# Altium PCB GimbalPCB.PcbDoc
Units mil, origin at the board's own origin, x right, y up, seen from the top; angles counter-clockwise.
Board outline 2362.2 x 2559.06 mil, 2 copper layers (Top Layer, Bottom Layer); 15 components, 16 nets, 60 pads, 12 vias.
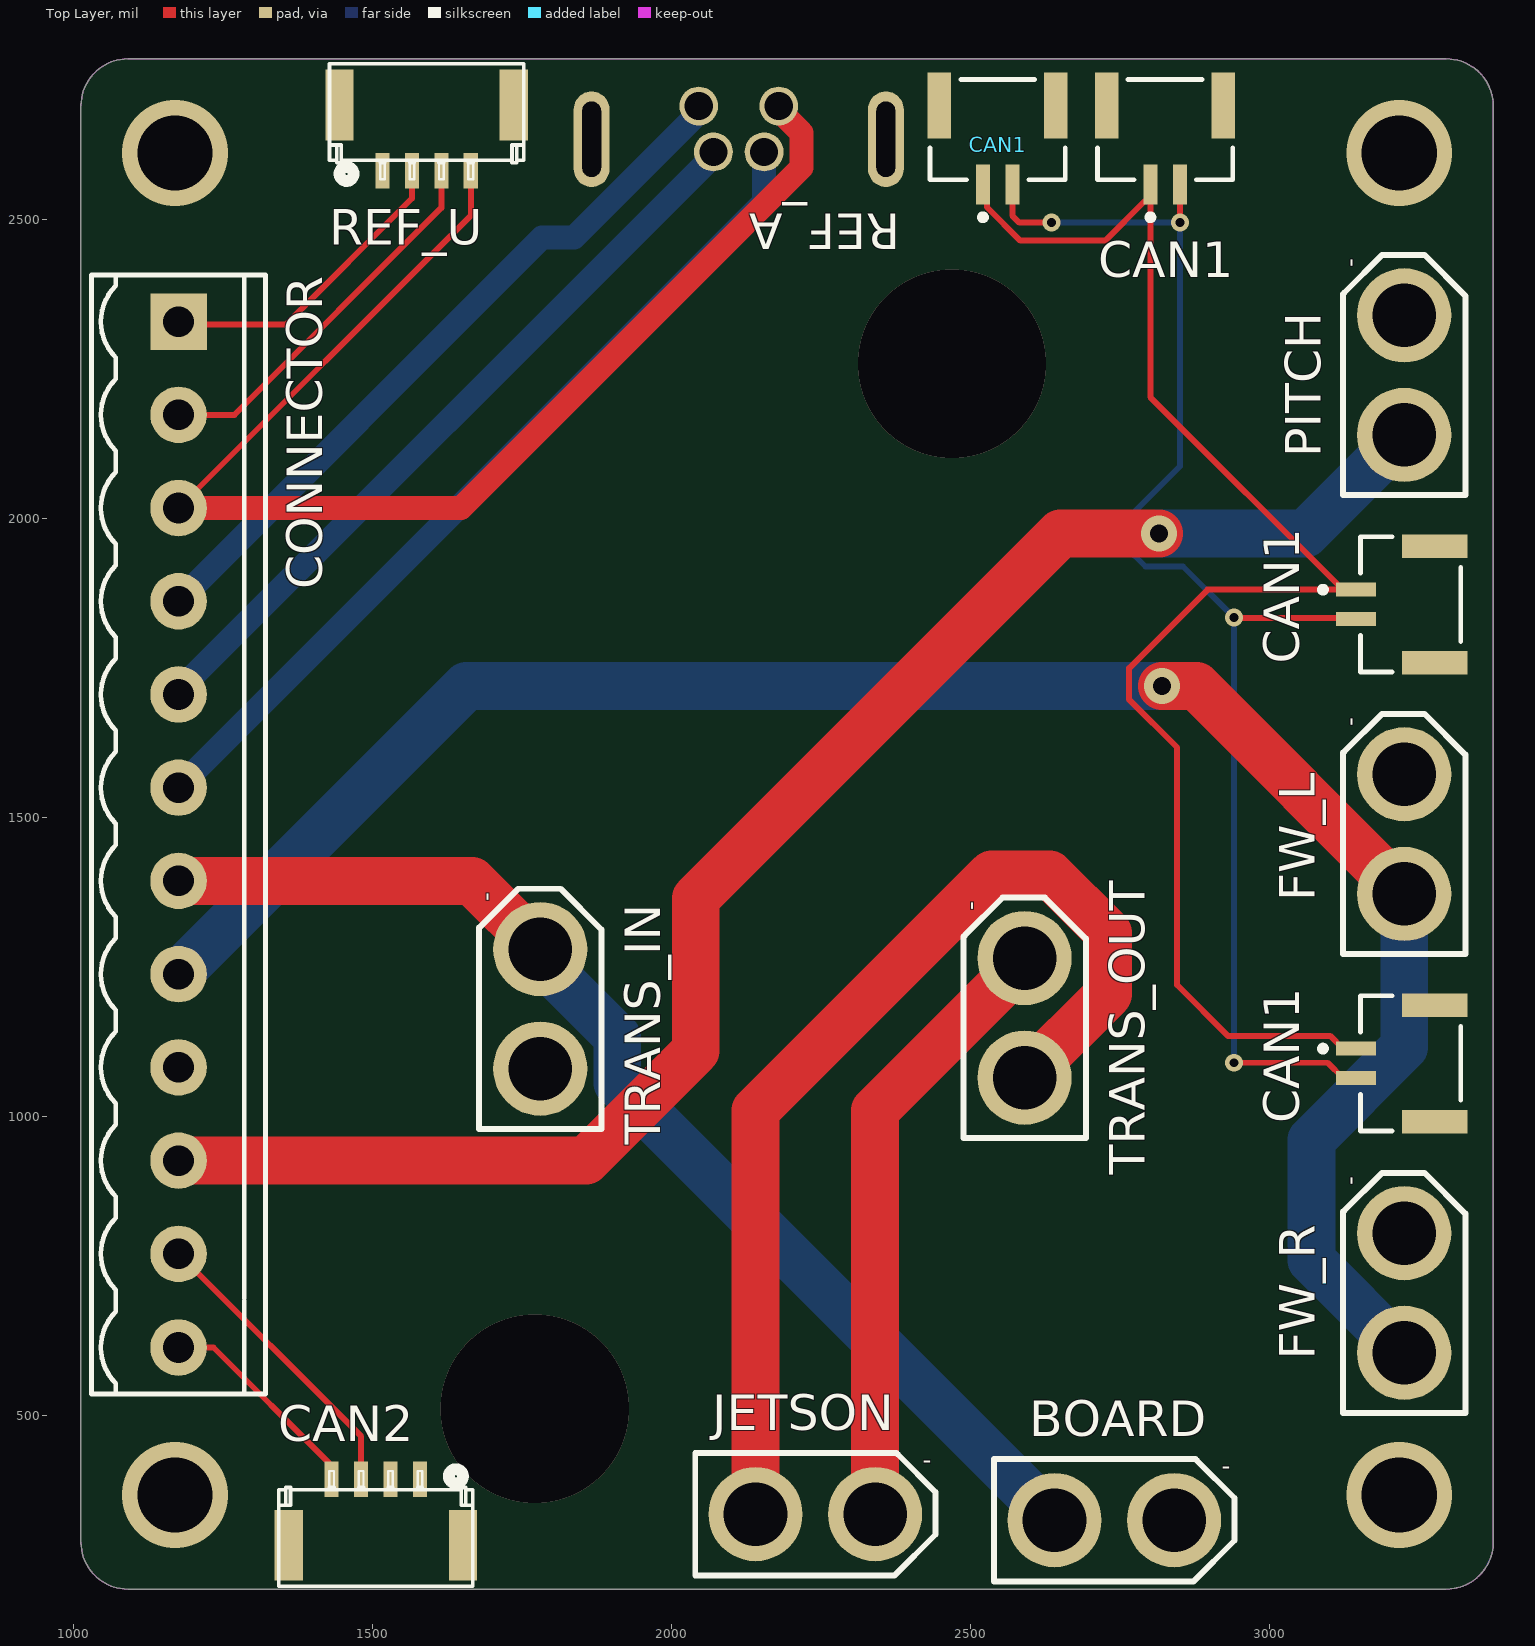
[diagram p0: Top Layer view]
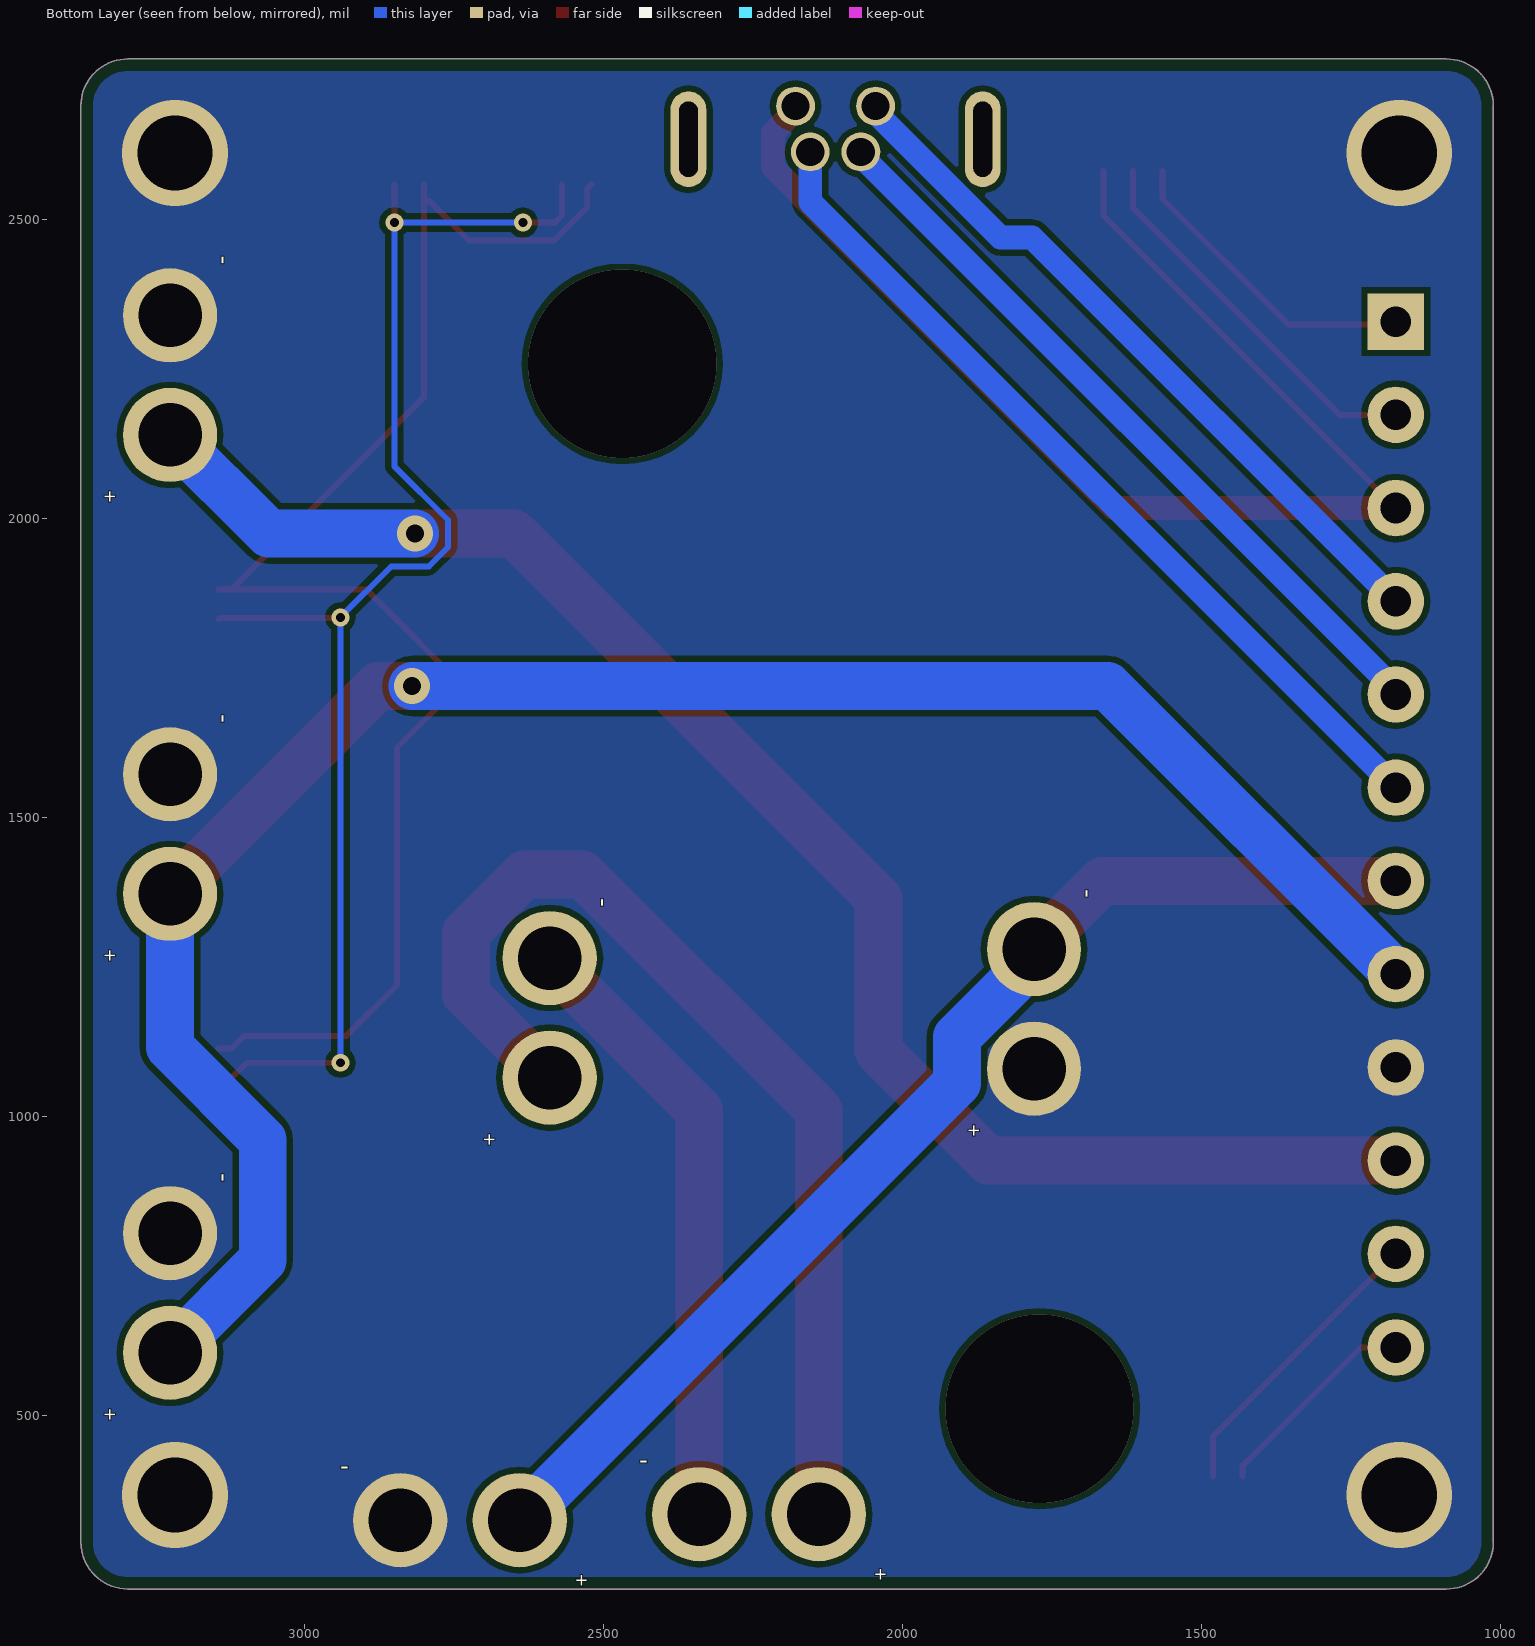
[diagram p1: Bottom Layer view, seen from below]

## Layer stack, top to bottom
Top Solder: solder mask 0.4, Solder Resist, Dk 3.5
Top Layer: signal copper 1.4
Dielectric 1: dielectric 12.6, FR-4, Dk 4.8
Bottom Layer: signal copper 1.4
Bottom Solder: solder mask 0.4, Solder Resist, Dk 3.5

## Board outline
1011.79,288.5 1011.79,2690.08 cw(c1090.53,2690.08) 1090.53,2768.82 3295.26,2768.82 cw(c3295.26,2690.08) 3374,2690.08 3374,288.5 cw(c3295.26,288.5) 3295.26,209.76 1090.53,209.76 cw(c1090.53,288.5)

## Design rules (kind name [scope] priority, off if disabled: settings)
BoardOutlineClearance [All] p1: gap=20 ignorepadtopadclearanceinfootprint=FALSE
Clearance [All] p1: gap=10 ignorepadtopadclearanceinfootprint=FALSE except(0: Arc-Hole Track-Hole SMDPad-Hole THPad-Hole Via-Hole Fill-Hole Poly-Hole Region-Hole Text-Hole)
PlaneConnect [All] p1: planeconnectstyle=Direct reliefexpansion=20 reliefentries=4 reliefconductorwidth=10 reliefairgap=10
PolygonConnect [All] p1: connectstyle=Direct reliefconductorwidth=10 reliefentries=4 polygonreliefangle="90 Angle" airgapwidth=10
RoutingVias [All] p1: holewidth=28 width=50 viastyle="Through Hole" minholewidth=28 minwidth=50 maxholewidth=28 maxwidth=50
SolderMaskExpansion [All] p1: expansion=4 istentingtop=FALSE
Width [All] p1: maxlimit=80 minlimit=10 preferedwidth=10 minimp=50.000000 maximp=50.000000 favimp=50.000000
29 further rules are at their usual default settings.

## Classes and differential pairs
component class "MAIN Schematic": CAN1 CAN2 CONNECTOR FW_L FW_R JETSON PITCH REF_A REF_U TRANS_IN TRANS_OUT

## Components (designator, comment, footprint, x,y, rotation, side; value= is the part's Value field where it differs from the comment)
BOARD "XT PLUGIN" XT30-M 2740,325 r0 top
CAN1 "CAN1" JST-BM02B-GHS-TBT_V 2825,2625 r0 top
CAN1 "CAN1" JST-BM02B-GHS-TBT_V 3210,1089.09 r270 top
CAN1 "CAN1" JST-BM02B-GHS-TBT_V 3210,1856.59 r270 top
CAN1 "CAN1" JST-BM02B-GHS-TBT_V 2545,2625 r0 top
CAN2 "gh1.25_4p" GH1.25-LS-4P 1505,295 r0 top
CONNECTOR "HDR-1X12" HT3.96-LI-12P 1175,1471.26 r270 top
FW_L "XT PLUGIN" XT30-M 3224.83,1472.5 r90 top
FW_R "XT PLUGIN" XT30-M 3224.83,705 r90 top
JETSON "XT PLUGIN" XT30-M 2240,335 r0 top
PITCH "XT PLUGIN" XT30-M 3224.83,2240 r90 top
REF_A "Referee_Air" "M8 Connector" 2111.93,2652.6 r180 top
REF_U "gh1.25_4p" GH1.25-LS-4P 1590,2680 r180 top
TRANS_IN "XT PLUGIN" XT30-M 1780,1180 r90 top
TRANS_OUT "XT PLUGIN" XT30-M 2590,1165 r90 top

## Footprints (in the part's own frame and the unit in brackets; to place one, negate y for a bottom-side part, rotate by r counter-clockwise, add the part's x,y. Pads: shape width x height; smd on the part's side, far side on the other; paste and mask are expansions set on the pad)
GH1.25-LS-4P [mm] "A1257WR-S-4P"
  rect 1.2x3 smd: 0(-3.7,-0.3) 0(3.7,-0.3)
  rect 0.6x1.5 smd: 1(1.875,2.5) 2(0.625,2.5) 3(-0.625,2.5) 4(-1.875,2.5)
  silkscreen extent -4.13,-2.05 4.12,2.93, body extent -4.12,-2.15 4.12,2.25, height 4.2
HT3.96-LI-12P [mm] "HT3.96立插端子 淘宝ID:黄晶宝石   店铺网址:https://shop463601444.taobao.com"
  rect 2.4x2.4 hole 1.3: 1(-21.8,0)
  round 2.4 hole 1.3: 2(-17.84,0) 3(-13.88,0) 4(-9.92,0) 5(-5.96,0) 6(-2,0) 7(1.96,0) 8(5.92,0) 9(9.88,0) 10(13.84,0) 11(17.8,0) 12(21.78,0)
  silkscreen extent -23.78,-3.7 23.76,3.7, body extent -23.8,-3.7 23.78,3.7, height 10.05
JST-BM02B-GHS-TBT_V [mm] "Connector, 2-Leads, Body 5.75x4.25mm, Pitch 1.25mm"
  rect 0.6x1.7 smd: 1(-0.625,-1.675) 2(0.625,-1.675)
  rect 1x2.8 smd: MP1(-2.475,1.675) MP2(2.475,1.675)
  silkscreen extent -2.88,-3.2 2.88,2.78, body extent -2.88,-2.17 2.87,2.78, height 4.21
"M8 Connector" [mm]
  round 1.65 hole 1.2: 0(-1.075,1) 1(1.075,1) 2(-1.7,-0.95) 3(1.7,-0.95)
  oval 1.524x4.064 hole 0.8 slot 3.2 at 90 deg: 4(-6.25,0.46) 5(6.25,0.46)
  body extent -6.25,-19.34 6.25,1.96, height 11.3
XT30-M [mm]
  round 4 hole 2.7: 1(-2.54,0) 2(2.54,0)
  silkscreen extent -5.1,-2.6 5.11,2.6, body extent -5.18,-2.8 5.02,2.8, height 10.66

## Part data
CAN1 CAN1 CAN1 CAN1: library part CMP-2000-05957-1, "Disconnectable Crimp Style Connector, Pitch 1.25 mm, 1 x 2 Position, Height 4.05 mm, -25 to 85 degC, RoHS, Tape and Reel", Color=Natural, Manufacturer=JST-Sales-America-Inc., Package Description="Disconnectable Crimp Style Connector, Pitch 1.25 mm, 1 x 2 Position, Height 4.05 mm", Package Reference=BM02B-GHS-TBT, Category=Connectors,Interconnects, Connector Type=Header,Shrouded, Contact Finish=Tin, Contact Finish Thickness=-, Contact Mating Length=-, Contact Type=OuterShroudContact, Datasheet URL=http://www.jst-mfg.com/product/pdf/eng/eGH.pdf, Datasheet Version=05/2016, Family=RectangularConnectors-Headers,MalePins, Fastening Type=LockingRamp, Features=SolderRetention, Manufacturer URL=http://www.jst.com/home2.html, Mounting Technology=SurfaceMount, Mounting Type=SurfaceMount, Number of Positions=2, Number of Positions Loaded=All, Number of Rows=1, Packaging=Digi-Reel®, Pitch="0.049\"(1.25mm)", Row Spacing=-, Series=GH, Termination=Solder
CONNECTOR: library part "Header 12", "12P接插件", BOM名称=12P接插件, 学习资源=https://shop463601444.taobao.com, 版权归属="封装库来自淘宝卖家 ID：黄晶宝石"

## Via types
v1: diameter 177.17, hole 125.98, Top Layer to Bottom Layer, 4 vias
v2: diameter 30, hole 15, Top Layer to Bottom Layer, 4 vias
v3: diameter 60, hole 30, Top Layer to Bottom Layer, 2 vias
v4: diameter 314.96, hole 314.96, Top Layer to Bottom Layer, 2 vias

## Nets (pads, with @x,y where several pads share a name; then routed paths per layer and width w, separated by ;. In a path a pad name is that pad's centre, name@x,y a point inside that pad or via, vN(x,y) a via of type N, cw(c..) or ccw(c..) an arc to the next point about the centre after c; other vN are vias at no path point)
5V0: JETSON.2 TRANS_OUT.2 | length 1033.6
  Top Layer w80: JETSON.2 2340,1010 2590,1260 TRANS_OUT.2
AMMO_DC: CONNECTOR.8 FW_L.1 FW_R.1 | length 3289.1
  Top Layer w80: v3(2820,1720) 2877.33,1720 FW_L.1
  Bottom Layer w80: CONNECTOR.8 1656.81,1720 v3(2820,1720) ; FW_R.1 3070,759.83 3070,961.14 3224.83,1115.97 FW_L.1
CAN1_H: CAN1.2 | length 2375.1
  Top Layer w10: CAN1.2@2569.61,2559.06 2569.61,2506.71 2581.32,2495 v2(2635,2495) ; CAN1.2@2849.61,2559.06 2849.8,2558.86 v2(2849.8,2495.2) ; v2(2940,1090) 3096.88,1090 3122.4,1064.48 CAN1.2@3144.06,1064.48 ; v2(2940,1835) 2941.51,1833.49 3142.55,1833.49 CAN1.2@3144.06,1831.98
  Bottom Layer w10: v2(2635,2495) 2635.1,2495.1 2849.7,2495.1 v2(2849.8,2495.2) 2849.8,2087.58 2760,1997.78 2760,1952.22 2792.22,1920 2855,1920 v2(2940,1835) v2(2940,1090)
CAN1_L: CAN1.1 | length 2518.2
  Top Layer w10: CAN1.1@2520.39,2559.06 2527.2,2552.24 2527.2,2520.83 2583.03,2465 2725,2465 2790.59,2530.59 2793.58,2530.59 CAN1.1@2800.39,2537.4 ; CAN1.1@2800.39,2559.06 CAN1.1@2800.39,2537.4 ; CAN1.1@3144.06,1113.69 3122.4,1113.69 3101.1,1135 2930,1135 2845,1220 2845,1617.22 2765,1697.22 2765,1750 2845,1830 2896.19,1881.19 CAN1.1@3122.4,1881.19 ; CAN1.1@3144.06,1881.19 CAN1.1@3122.4,1881.19 ; CAN1.1@2800.39,2537.4 2800.39,2203.2 CAN1.1@3122.4,1881.19
CAN2_H: CAN2.3 CONNECTOR.11 | length 498.5
  Top Layer w10: CONNECTOR.11 1480.39,465.08 CAN2.3@1480.39,398.43
CAN2_L: CAN2.4 CONNECTOR.12 | length 355.8
  Top Layer w10: CONNECTOR.12 1233.54,613.78 1424.37,422.95 1431.18,416.14 CAN2.4@1431.18,398.43
GIMBAL_DC: CONNECTOR.10 PITCH.1 | length 2701.9
  Top Layer w80: CONNECTOR.10 1856.38,926.38 2040,1110 2040,1365 2650,1975 v3(2815,1975)
  Bottom Layer w80: v3(2815,1975) 3059.83,1975 PITCH.1
GND: BOARD.2 CONNECTOR.9 FW_L.2 FW_R.2 PITCH.2 TRANS_IN.1
  other v1: 1169.27,367.24 3216.52,367.24 1169.27,2611.34 3216.52,2611.34
MPC_DC: BOARD.1 CONNECTOR.7 TRANS_IN.2 | length 1963.5
  Top Layer w80: CONNECTOR.7 1665.91,1394.09 TRANS_IN.2
  Bottom Layer w80: TRANS_IN.2 1780,1262.07 1908.74,1133.33 1908.74,1056.26 BOARD.1
REFEREE_A1: CONNECTOR.6 REF_A.0 | length 1468.8
  Bottom Layer w40: CONNECTOR.6 2154.25,2529.25 REF_A.0
REFEREE_A2: CONNECTOR.5 REF_A.1 | length 1277.9
  Bottom Layer w40: CONNECTOR.5 1175,1712.26 2069.61,2606.87 REF_A.1
REFEREE_A3: CONNECTOR.4 REF_A.3 | length 1219.6
  Bottom Layer w40: CONNECTOR.4 1783.19,2470 1836.23,2470 2040.22,2673.99 2040.22,2685.22 REF_A.3
REFEREE_GND: CONNECTOR.3 REF_A.2 REF_U.4 | length 2162.4
  Top Layer w10: CONNECTOR.3 1663.82,2506.54 REF_U.4
  Top Layer w40: CONNECTOR.3 1647.1,2017.72 2216.73,2587.35 2216.73,2645.37 2178.86,2683.25 REF_A.2
REFEREE_UR: CONNECTOR.2 REF_U.3 | length 644.9
  Top Layer w10: CONNECTOR.2 1268.62,2173.62 1614.61,2519.61 REF_U.3
REFEREE_UT: CONNECTOR.1 REF_U.2 | length 525.6
  Top Layer w10: CONNECTOR.1 1179.53,2325 1355,2325 1565.39,2535.39 REF_U.2
TRANSFGND: JETSON.1 TRANS_OUT.1 | length 1769.2
  Top Layer w80: JETSON.1 2140,1010 2535,1405 2632.07,1405 2730,1307.07 2730,1205 TRANS_OUT.1
pads on no net: CAN1.MP1 CAN1.MP2 CAN2.0 CAN2.1 CAN2.2 REF_A.4 REF_A.5 REF_U.0 REF_U.1
copper on no net:
  other v4: 1770.73,511.48 2468.48,2258.79

## Polygon pours and split planes (outlines as drawn)
GND on Bottom Layer "AMMO_GND_Poly" (solid, pour order 0): 1160,2925 800,2565 800,135 935,0 3330,0 3560,230 3560,2850.31

## Keep-outs
Keep-Out Layer:
  the board outline again, w0.5

## Silkscreen, mask and mechanical layers (free items; w line width, h text height)
Mechanical 1:
  circle w0.5: c1770.73,511.48 r157.48
  circle w0.5: c3216.52,2611.34 r62.99
  circle w0.5: c1169.27,367.24 r62.99
  circle w0.5: c2468.48,2258.79 r157.48
  circle w0.5: c1169.27,2611.34 r62.99
  circle w0.5: c3216.52,367.24 r62.99
  lines w0.5: 1011.79,288.5 ccw(c1090.53,288.5) 1090.53,209.76 3295.26,209.76 ccw(c3295.26,288.5) 3374,288.5 3374,2690.08 ccw(c3295.26,2690.08) 3295.26,2768.82 1090.53,2768.82 ccw(c1090.53,2690.08) 1011.79,2690.08 1011.79,288.5

## Text inside footprints (layer, text, board x,y; h text height)
BOARD: Bottom Overlay "-" at 2940,402 h30; Bottom Overlay "+" at 2547.89,215.76 h20; Top Overlay "-" at 2920,402 h30
FW_L: Bottom Overlay "-" at 3147.83,1672.5 h30 r90; Bottom Overlay "+" at 3334.07,1280.39 h20 r90; Top Overlay "-" at 3147.83,1652.5 h30 r90
FW_R: Bottom Overlay "-" at 3147.83,905 h30 r90; Bottom Overlay "+" at 3334.07,512.89 h20 r90; Top Overlay "-" at 3147.83,885 h30 r90
JETSON: Bottom Overlay "-" at 2440,412 h30; Bottom Overlay "+" at 2047.89,225.76 h20; Top Overlay "-" at 2420,412 h30
PITCH: Bottom Overlay "-" at 3147.83,2440 h30 r90; Bottom Overlay "+" at 3334.07,2047.89 h20 r90; Top Overlay "-" at 3147.83,2420 h30 r90
TRANS_IN: Bottom Overlay "-" at 1703,1380 h30 r90; Bottom Overlay "+" at 1889.24,987.89 h20 r90; Top Overlay "-" at 1703,1360 h30 r90
TRANS_OUT: Bottom Overlay "-" at 2513,1365 h30 r90; Bottom Overlay "+" at 2699.24,972.89 h20 r90; Top Overlay "-" at 2513,1345 h30 r90